# EAGLE board breakout (EAGLE 7.2.0)
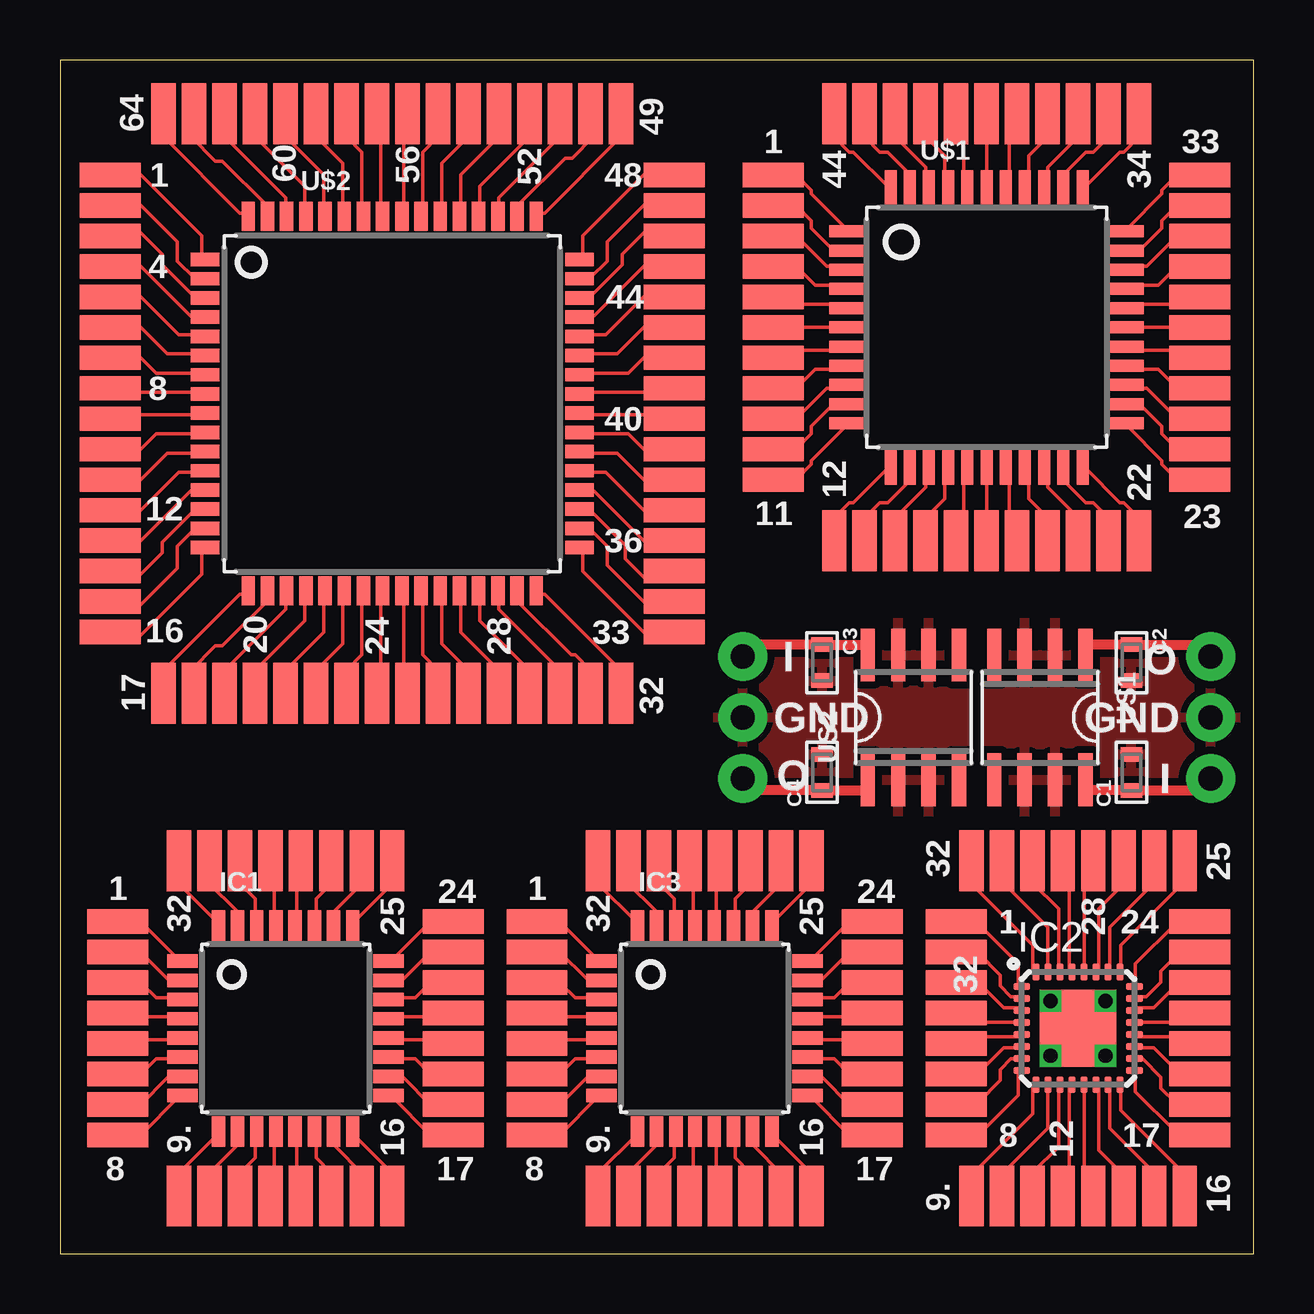
[diagram p0: board, top side]
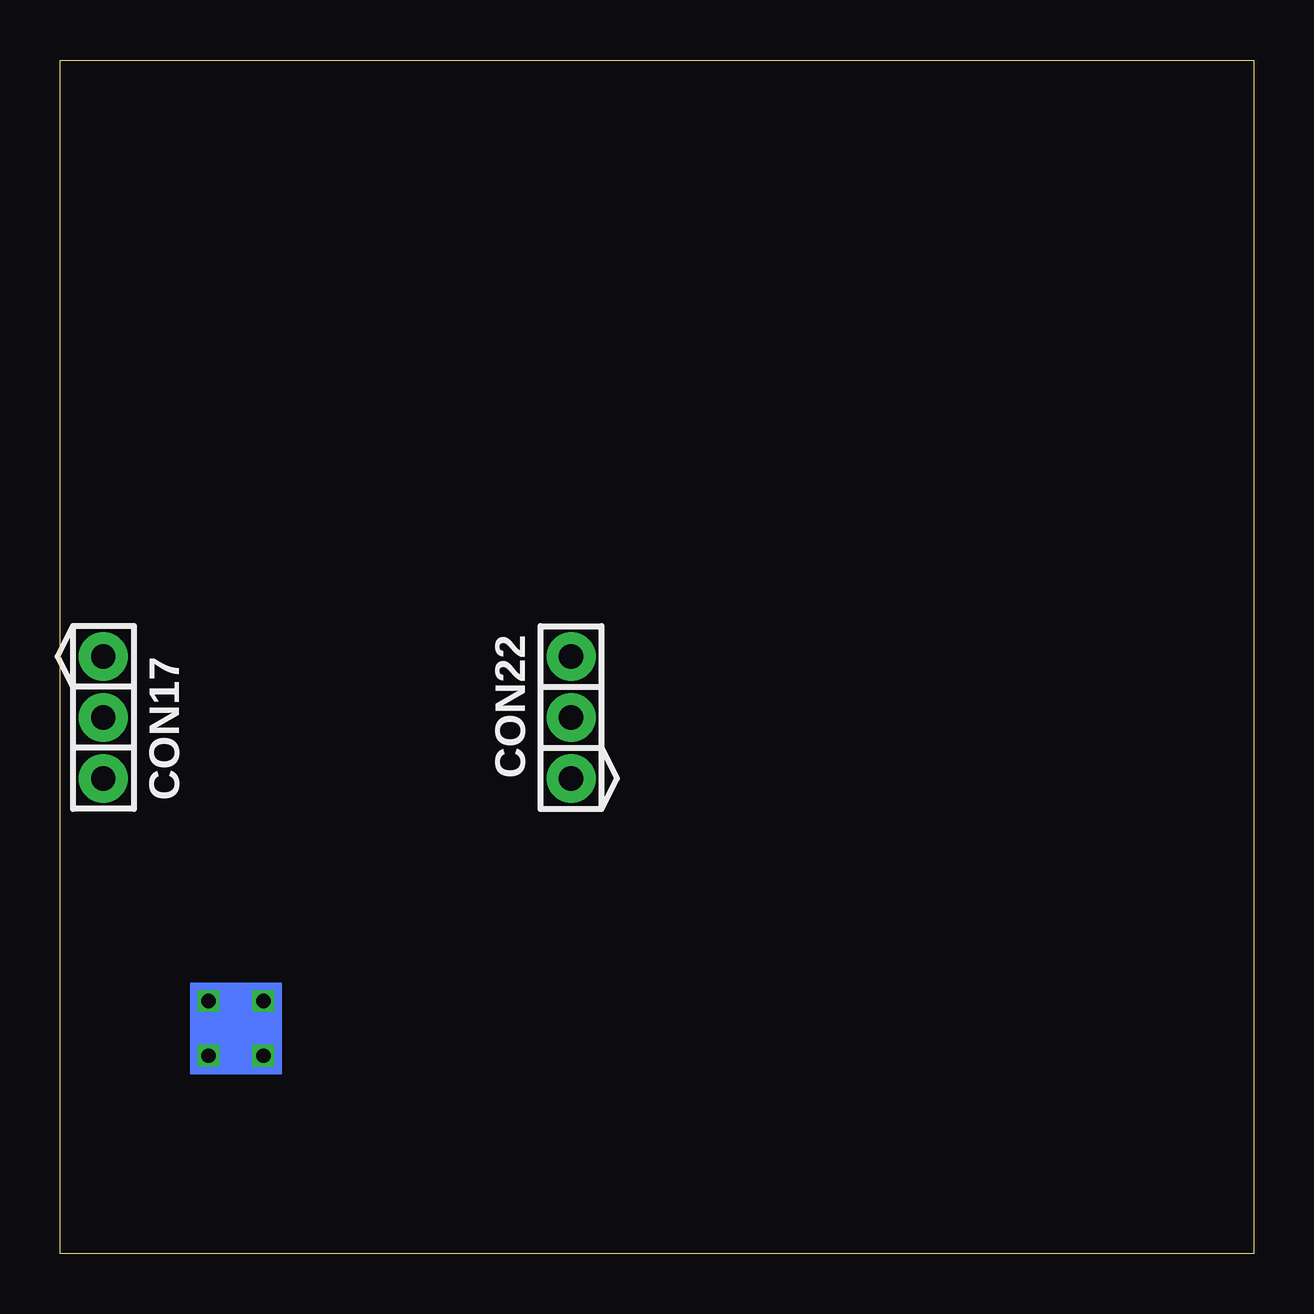
[diagram p1: board, bottom side, seen from below]

Size 49.75 x 49.75 mm. Coordinates in mm from the lower left corner, seen from the top.
Outline: 0,0 49.75,0 49.75,49.75 0,49.75 0,0
Copper layers (1*16): Top 0.035mm / dielectric 1.5mm / Bottom 0.035mm
Design rules "SeeedStudio_2layer_DRU_no_angle_20140221": minimum track width 6mil, minimum drill 12mil, track to track 6mil, track to pad 6mil, pad to pad 6mil, via to via 6mil, smd to smd 0mil, copper to edge 10mil, drill to drill 10mil, minimum pad ring 10mil, minimum via ring 6mil, stop-mask expansion 2mil, vias tented up to drill 100mil, thermal gap 10mil

## Footprints (pad centres in the part's own frame; a part is rotated, then mirrored left to right if it is on the bottom)
0603 = smd 0.6 x 0.9: 1 -0.75,0; 2 0.75,0
PIN8X1_SM50 = smd 1.016 x 2.54: P$1 -4.445,0; P$2 -3.175,0; P$3 -1.905,0; P$4 -0.635,0; P$5 0.635,0; P$6 1.905,0; P$7 3.175,0; P$8 4.445,0
PIN11X1_SM50 = smd 1.016 x 2.54: P$1 -6.35,0; P$2 -5.08,0; P$3 -3.81,0; P$4 -2.54,0; P$5 -1.27,0; P$6 0,0; P$7 1.27,0; P$8 2.54,0; P$9 3.81,0; P$10 5.08,0; P$11 6.35,0
PIN16X1_SM50 = smd 1.016 x 2.54: P$1 -9.525,0; P$2 -8.255,0; P$3 -6.985,0; P$4 -5.715,0; P$5 -4.445,0; P$6 -3.175,0; P$7 -1.905,0; P$8 -0.635,0; P$9 0.635,0; P$10 1.905,0; P$11 3.175,0; P$12 4.445,0; P$13 5.715,0; P$14 6.985,0; P$15 8.255,0; P$16 9.525,0
PIN3X1 = drill 1.016 pad 2.032: 1 -2.54,0; 2 0,0; 3 2.54,0
TQFP32 = smd 1.27 x 0.559: 1 -4.293,2.8; 2 -4.293,2; 3 -4.293,1.2; 4 -4.293,0.4; 5 -4.293,-0.4; 6 -4.293,-1.2; 7 -4.293,-2; 8 -4.293,-2.8; 17 4.293,-2.8; 18 4.293,-2; 19 4.293,-1.2; 20 4.293,-0.4; 21 4.293,0.4; 22 4.293,1.2; 23 4.293,2; 24 4.293,2.8 | smd 0.559 x 1.27: 9 -2.8,-4.293; 10 -2,-4.293; 11 -1.2,-4.293; 12 -0.4,-4.293; 13 0.4,-4.293; 14 1.2,-4.293; 15 2,-4.293; 16 2.8,-4.293; 25 2.8,4.293; 26 2,4.293; 27 1.2,4.293; 28 0.4,4.293; 29 -0.4,4.293; 30 -1.2,4.293; 31 -2,4.293; 32 -2.8,4.293
MLF32-TH = smd 0.7 x 0.3: 1 -2.35,1.75; 2 -2.35,1.25; 3 -2.35,0.75; 4 -2.35,0.25; 5 -2.35,-0.25; 6 -2.35,-0.75; 7 -2.35,-1.25; 8 -2.35,-1.75; 17 2.35,-1.75; 18 2.35,-1.25; 19 2.35,-0.75; 20 2.35,-0.25; 21 2.35,0.25; 22 2.35,0.75; 23 2.35,1.25; 24 2.35,1.75 | smd 0.3 x 0.7: 9 -1.75,-2.35; 10 -1.25,-2.35; 11 -0.75,-2.35; 12 -0.25,-2.35; 13 0.25,-2.35; 14 0.75,-2.35; 15 1.25,-2.35; 16 1.75,-2.35; 25 1.75,2.35; 26 1.25,2.35; 27 0.75,2.35; 28 0.25,2.35; 29 -0.25,2.35; 30 -0.75,2.35; 31 -1.25,2.35; 32 -1.75,2.35 | smd 3.2 x 3.2: TH 0,0
TQFP44 = smd 1.5 x 0.5: 1 -5.8,4; 2 -5.8,3.2; 3 -5.8,2.4; 4 -5.8,1.6; 5 -5.8,0.8; 6 -5.8,0; 7 -5.8,-0.8; 8 -5.8,-1.6; 9 -5.8,-2.4; 10 -5.8,-3.2; 11 -5.8,-4; 23 5.8,-4; 24 5.8,-3.2; 25 5.8,-2.4; 26 5.8,-1.6; 27 5.8,-0.8; 28 5.8,0; 29 5.8,0.8; 30 5.8,1.6; 31 5.8,2.4; 32 5.8,3.2; 33 5.8,4 | smd 0.5 x 1.5: 12 -4,-5.8; 13 -3.2,-5.8; 14 -2.4,-5.8; 15 -1.6,-5.8; 16 -0.8,-5.8; 17 0,-5.8; 18 0.8,-5.8; 19 1.6,-5.8; 20 2.4,-5.8; 21 3.2,-5.8; 22 4,-5.8; 34 4,5.8; 35 3.2,5.8; 36 2.4,5.8; 37 1.6,5.8; 38 0.8,5.8; 39 0,5.8; 40 -0.8,5.8; 41 -1.6,5.8; 42 -2.4,5.8; 43 -3.2,5.8; 44 -4,5.8
TQFP64 = smd 1.194 x 0.559: 1 -7.8,6; 2 -7.8,5.2; 3 -7.8,4.4; 4 -7.8,3.6; 5 -7.8,2.8; 6 -7.8,2; 7 -7.8,1.2; 8 -7.8,0.4; 9 -7.8,-0.4; 10 -7.8,-1.2; 11 -7.8,-2; 12 -7.8,-2.8; 13 -7.8,-3.6; 14 -7.8,-4.4; 15 -7.8,-5.2; 16 -7.8,-6; 33 7.8,-6; 34 7.8,-5.2; 35 7.8,-4.4; 36 7.8,-3.6; 37 7.8,-2.8; 38 7.8,-2; 39 7.8,-1.2; 40 7.8,-0.4; 41 7.8,0.4; 42 7.8,1.2; 43 7.8,2; 44 7.8,2.8; 45 7.8,3.6; 46 7.8,4.4; 47 7.8,5.2; 48 7.8,6 | smd 0.559 x 1.194: 17 -6,-7.8; 18 -5.2,-7.8; 19 -4.4,-7.8; 20 -3.6,-7.8; 21 -2.8,-7.8; 22 -2,-7.8; 23 -1.2,-7.8; 24 -0.4,-7.8; 25 0.4,-7.8; 26 1.2,-7.8; 27 2,-7.8; 28 2.8,-7.8; 29 3.6,-7.8; 30 4.4,-7.8; 31 5.2,-7.8; 32 6,-7.8; 49 6,7.8; 50 5.2,7.8; 51 4.4,7.8; 52 3.6,7.8; 53 2.8,7.8; 54 2,7.8; 55 1.2,7.8; 56 0.4,7.8; 57 -0.4,7.8; 58 -1.2,7.8; 59 -2,7.8; 60 -2.8,7.8; 61 -3.6,7.8; 62 -4.4,7.8; 63 -5.2,7.8; 64 -6,7.8
SO08 = smd 0.6 x 2.2: 1 -1.905,-2.6; 2 -0.635,-2.6; 3 0.635,-2.6; 4 1.905,-2.6; 5 1.905,2.6; 6 0.635,2.6; 7 -0.635,2.6; 8 -1.905,2.6

## Placement (x,y rotation side)
C1  [0603]  44.64,20.07 90 top
C2  [0603]  44.64,24.64 270 top
C3  [0603]  31.75,24.64 270 top
C4  [0603]  31.75,20.07 90 top
CON1  [PIN8X1_SM50]  2.41,9.4 270 top
CON2  [PIN8X1_SM50]  9.4,2.41 0 top
CON3  [PIN8X1_SM50]  16.38,9.4 90 top
CON4  [PIN8X1_SM50]  9.4,16.38 180 top
CON5  [PIN11X1_SM50]  29.72,38.61 270 top
CON6  [PIN11X1_SM50]  38.61,29.72 0 top
CON7  [PIN11X1_SM50]  47.5,38.61 90 top
CON8  [PIN11X1_SM50]  38.61,47.5 180 top
CON9  [PIN16X1_SM50]  2.1,35.43 270 top
CON10  [PIN16X1_SM50]  13.84,23.37 0 top
CON11  [PIN16X1_SM50]  25.59,35.43 90 top
CON12  [PIN16X1_SM50]  13.84,47.5 180 top
CON13  [PIN8X1_SM50]  37.34,9.4 270 top
CON14  [PIN8X1_SM50]  42.42,2.41 0 top
CON15  [PIN8X1_SM50]  47.5,9.4 90 top
CON16  [PIN8X1_SM50]  42.42,16.38 180 top
CON17  [PIN3X1]  47.94,22.35 270 bottom
CON18  [PIN8X1_SM50]  19.88,9.4 270 top
CON19  [PIN8X1_SM50]  26.86,2.41 0 top
CON20  [PIN8X1_SM50]  33.85,9.4 90 top
CON21  [PIN8X1_SM50]  26.86,16.38 180 top
CON22  [PIN3X1]  28.45,22.35 90 bottom
IC1  [TQFP32]  9.4,9.4 0 top
IC2  [MLF32-TH]  42.42,9.4 0 top
IC3  [TQFP32]  26.86,9.4 0 top
U$1  44TQFP  [TQFP44]  38.61,38.61 0 top
U$2  64TQFP  [TQFP64]  13.84,35.43 0 top
US1  [SO08]  40.83,22.35 180 top
US2  [SO08]  35.56,22.35 0 top

## Library data of the parts
C1-C4 = PN_default
CON1-CON16 CON18-CON21 IC1-IC3 U$1 U$2 = us_obudowy
CON17 CON22 = pins
US1 US2 = semiconductors

## Nets
N$1: CON1.P$1 IC1.1
N$2: CON1.P$2 IC1.2
N$3: CON1.P$3 IC1.3
N$4: CON1.P$4 IC1.4
N$5: CON1.P$5 IC1.5
N$6: CON1.P$6 IC1.6
N$7: CON1.P$7 IC1.7
N$8: CON1.P$8 IC1.8
N$9: CON2.P$1 IC1.9
N$10: CON2.P$2 IC1.10
N$11: CON2.P$3 IC1.11
N$12: CON2.P$4 IC1.12
N$13: CON2.P$5 IC1.13
N$14: CON2.P$6 IC1.14
N$15: CON2.P$7 IC1.15
N$16: CON2.P$8 IC1.16
N$17: CON3.P$1 IC1.17
N$18: CON3.P$2 IC1.18
N$19: CON3.P$3 IC1.19
N$20: CON3.P$4 IC1.20
N$21: CON3.P$5 IC1.21
N$22: CON3.P$6 IC1.22
N$23: CON3.P$7 IC1.23
N$24: CON3.P$8 IC1.24
N$25: CON4.P$1 IC1.25
N$26: CON4.P$2 IC1.26
N$27: CON4.P$3 IC1.27
N$28: CON4.P$4 IC1.28
N$29: CON4.P$5 IC1.29
N$30: CON4.P$6 IC1.30
N$31: CON4.P$7 IC1.31
N$32: CON4.P$8 IC1.32
N$33: CON5.P$1 U$1.1
N$34: CON5.P$2 U$1.2
N$35: CON5.P$3 U$1.3
N$36: CON5.P$4 U$1.4
N$37: CON5.P$5 U$1.5
N$38: CON5.P$6 U$1.6
N$39: CON5.P$7 U$1.7
N$40: CON5.P$8 U$1.8
N$41: CON5.P$9 U$1.9
N$42: CON5.P$10 U$1.10
N$43: CON5.P$11 U$1.11
N$44: CON6.P$1 U$1.12
N$45: CON6.P$2 U$1.13
N$46: CON6.P$3 U$1.14
N$47: CON6.P$4 U$1.15
N$48: CON6.P$5 U$1.16
N$49: CON6.P$6 U$1.17
N$50: CON6.P$7 U$1.18
N$51: CON6.P$8 U$1.19
N$52: CON6.P$9 U$1.20
N$53: CON6.P$10 U$1.21
N$54: CON6.P$11 U$1.22
N$55: CON7.P$1 U$1.23
N$56: CON7.P$2 U$1.24
N$57: CON7.P$3 U$1.25
N$58: CON7.P$4 U$1.26
N$59: CON7.P$5 U$1.27
N$60: CON7.P$6 U$1.28
N$61: CON7.P$7 U$1.29
N$62: CON7.P$8 U$1.30
N$63: CON7.P$9 U$1.31
N$64: CON7.P$10 U$1.32
N$65: CON7.P$11 U$1.33
N$66: CON8.P$1 U$1.34
N$67: CON8.P$2 U$1.35
N$68: CON8.P$3 U$1.36
N$69: CON8.P$4 U$1.37
N$70: CON8.P$5 U$1.38
N$71: CON8.P$6 U$1.39
N$72: CON8.P$7 U$1.40
N$73: CON8.P$8 U$1.41
N$74: CON8.P$9 U$1.42
N$75: CON8.P$10 U$1.43
N$76: CON8.P$11 U$1.44
N$77: CON9.P$1 U$2.1
N$78: CON9.P$2 U$2.2
N$79: CON9.P$3 U$2.3
N$80: CON9.P$4 U$2.4
N$81: CON9.P$5 U$2.5
N$82: CON9.P$6 U$2.6
N$83: CON9.P$7 U$2.7
N$84: CON9.P$8 U$2.8
N$85: CON9.P$9 U$2.9
N$86: CON9.P$10 U$2.10
N$87: CON9.P$11 U$2.11
N$88: CON9.P$12 U$2.12
N$89: CON9.P$13 U$2.13
N$90: CON9.P$14 U$2.14
N$91: CON9.P$15 U$2.15
N$92: CON9.P$16 U$2.16
N$93: CON10.P$1 U$2.17
N$94: CON10.P$2 U$2.18
N$95: CON10.P$3 U$2.19
N$96: CON10.P$4 U$2.20
N$97: CON10.P$5 U$2.21
N$98: CON10.P$6 U$2.22
N$99: CON10.P$7 U$2.23
N$100: CON10.P$8 U$2.24
N$101: CON10.P$9 U$2.25
N$102: CON10.P$10 U$2.26
N$103: CON10.P$11 U$2.27
N$104: CON10.P$12 U$2.28
N$105: CON10.P$13 U$2.29
N$106: CON10.P$14 U$2.30
N$107: CON10.P$15 U$2.31
N$108: CON10.P$16 U$2.32
N$109: CON11.P$1 U$2.33
N$110: CON11.P$2 U$2.34
N$111: CON11.P$3 U$2.35
N$112: CON11.P$4 U$2.36
N$113: CON11.P$5 U$2.37
N$114: CON11.P$6 U$2.38
N$115: CON11.P$7 U$2.39
N$116: CON11.P$8 U$2.40
N$117: CON11.P$9 U$2.41
N$118: CON11.P$10 U$2.42
N$119: CON11.P$11 U$2.43
N$120: CON11.P$12 U$2.44
N$121: CON11.P$13 U$2.45
N$122: CON11.P$14 U$2.46
N$123: CON11.P$15 U$2.47
N$124: CON11.P$16 U$2.48
N$125: CON12.P$1 U$2.49
N$126: CON12.P$2 U$2.50
N$127: CON12.P$3 U$2.51
N$128: CON12.P$4 U$2.52
N$129: CON12.P$5 U$2.53
N$130: CON12.P$6 U$2.54
N$131: CON12.P$7 U$2.55
N$132: CON12.P$8 U$2.56
N$133: CON12.P$9 U$2.57
N$134: CON12.P$10 U$2.58
N$135: CON12.P$11 U$2.59
N$136: CON12.P$12 U$2.60
N$137: CON12.P$13 U$2.61
N$138: CON12.P$14 U$2.62
N$139: CON12.P$15 U$2.63
N$140: CON12.P$16 U$2.64
N$141: CON13.P$1 IC2.1
N$142: CON13.P$2 IC2.2
N$143: CON13.P$3 IC2.3
N$144: CON13.P$4 IC2.4
N$145: CON13.P$5 IC2.5
N$146: CON13.P$6 IC2.6
N$147: CON13.P$7 IC2.7
N$148: CON13.P$8 IC2.8
N$149: CON14.P$1 IC2.9
N$150: CON14.P$2 IC2.10
N$151: CON14.P$3 IC2.11
N$152: CON14.P$4 IC2.12
N$153: CON14.P$5 IC2.13
N$154: CON14.P$6 IC2.14
N$155: CON14.P$7 IC2.15
N$156: CON14.P$8 IC2.16
N$157: CON15.P$1 IC2.17
N$158: CON15.P$2 IC2.18
N$159: CON15.P$3 IC2.19
N$160: CON15.P$4 IC2.20
N$161: CON15.P$5 IC2.21
N$162: CON15.P$6 IC2.22
N$163: CON15.P$7 IC2.23
N$164: CON15.P$8 IC2.24
N$165: CON16.P$1 IC2.25
N$166: CON16.P$2 IC2.26
N$167: CON16.P$3 IC2.27
N$168: CON16.P$4 IC2.28
N$169: CON16.P$5 IC2.29
N$170: CON16.P$6 IC2.30
N$171: CON16.P$7 IC2.31
N$172: CON16.P$8 IC2.32
N$177: C2.1 CON17.1 US1.1
N$178: C1.1 CON17.3 US1.8
N$179: C1.2 C2.2 CON17.2 US1.2 US1.3 US1.6 US1.7
N$180: CON18.P$1 IC3.1
N$181: CON18.P$2 IC3.2
N$182: CON18.P$3 IC3.3
N$183: CON18.P$4 IC3.4
N$184: CON18.P$5 IC3.5
N$185: CON18.P$6 IC3.6
N$186: CON18.P$7 IC3.7
N$187: CON18.P$8 IC3.8
N$188: CON19.P$1 IC3.9
N$189: CON19.P$2 IC3.10
N$190: CON19.P$3 IC3.11
N$191: CON19.P$4 IC3.12
N$192: CON19.P$5 IC3.13
N$193: CON19.P$6 IC3.14
N$194: CON19.P$7 IC3.15
N$195: CON19.P$8 IC3.16
N$196: CON20.P$1 IC3.17
N$197: CON20.P$2 IC3.18
N$198: CON20.P$3 IC3.19
N$199: CON20.P$4 IC3.20
N$200: CON20.P$5 IC3.21
N$201: CON20.P$6 IC3.22
N$202: CON20.P$7 IC3.23
N$203: CON20.P$8 IC3.24
N$204: CON21.P$1 IC3.25
N$205: CON21.P$2 IC3.26
N$206: CON21.P$3 IC3.27
N$207: CON21.P$4 IC3.28
N$208: CON21.P$5 IC3.29
N$209: CON21.P$6 IC3.30
N$210: CON21.P$7 IC3.31
N$211: CON21.P$8 IC3.32
N$212: C4.1 CON22.1 US2.1
N$213: C3.1 CON22.3 US2.8
N$214: C3.2 C4.2 CON22.2 US2.2 US2.3 US2.6 US2.7

## Tracks (layer width: path | path; a pad name or v marks a point on that pad's centre or on a via)
N$1
  Top 0.152: CON1.P$1 3.37,13.84 4.95,12.26 IC1.1
N$2
  Top 0.152: CON1.P$2 3.37,12.57 4.48,11.46 4.95,11.46 IC1.2
N$3
  Top 0.152: CON1.P$3 3.37,11.3 4,10.67 4.95,10.67 IC1.3
N$4
  Top 0.152: CON1.P$4 2.57,9.87 4.95,9.87 IC1.4
N$5
  Top 0.152: CON1.P$5 2.57,8.92 4.95,8.92 IC1.5
N$6
  Top 0.152: CON1.P$6 3.37,7.49 4,8.13 4.95,8.13 IC1.6
N$7
  Top 0.152: CON1.P$7 3.37,6.22 4.48,7.33 4.95,7.33 IC1.7
N$8
  Top 0.152: CON1.P$8 3.37,4.95 4.95,6.54 IC1.8
N$9
  Top 0.152: CON2.P$1 4.95,3.37 6.54,4.95 IC1.9
N$10
  Top 0.152: CON2.P$2 6.22,3.37 7.33,4.48 7.33,4.95 IC1.10
N$11
  Top 0.152: CON2.P$3 7.49,3.37 8.13,4 8.13,4.95 IC1.11
N$12
  Top 0.152: CON2.P$4 8.92,2.57 8.92,4.95 IC1.12
N$13
  Top 0.152: CON2.P$5 9.87,2.57 9.87,4.95 IC1.13
N$14
  Top 0.152: CON2.P$6 11.3,3.37 10.67,4 10.67,4.95 IC1.14
N$15
  Top 0.152: CON2.P$7 12.57,3.37 11.46,4.48 11.46,4.95 IC1.15
N$16
  Top 0.152: CON2.P$8 13.84,3.37 12.26,4.95 IC1.16
N$17
  Top 0.152: CON3.P$1 15.43,4.95 13.84,6.54 IC1.17
N$18
  Top 0.152: CON3.P$2 15.43,6.22 14.32,7.33 13.84,7.33 IC1.18
N$19
  Top 0.152: CON3.P$3 15.43,7.49 14.8,8.13 13.84,8.13 IC1.19
N$20
  Top 0.152: CON3.P$4 16.22,8.92 13.84,8.92 IC1.20
N$21
  Top 0.152: CON3.P$5 16.22,9.87 13.84,9.87 IC1.21
N$22
  Top 0.152: CON3.P$6 15.43,11.3 14.8,10.67 13.84,10.67 IC1.22
N$23
  Top 0.152: CON3.P$7 15.43,12.57 14.32,11.46 13.84,11.46 IC1.23
N$24
  Top 0.152: CON3.P$8 15.43,13.84 13.84,12.26 IC1.24
N$25
  Top 0.152: CON4.P$1 13.84,15.43 12.26,13.84 IC1.25
N$26
  Top 0.152: CON4.P$2 12.57,15.43 11.46,14.32 11.46,13.84 IC1.26
N$27
  Top 0.152: CON4.P$3 11.3,15.43 10.67,14.8 10.67,13.84 IC1.27
N$28
  Top 0.152: CON4.P$4 9.87,16.22 9.87,13.84 IC1.28
N$29
  Top 0.152: CON4.P$5 8.92,16.22 8.92,13.84 IC1.29
N$30
  Top 0.152: CON4.P$6 7.49,15.43 8.13,14.8 8.13,13.84 IC1.30
N$31
  Top 0.152: CON4.P$7 6.22,15.43 7.33,14.32 7.33,13.84 IC1.31
N$32
  Top 0.152: CON4.P$8 4.95,15.43 6.54,13.84 IC1.32
N$33
  Top 0.152: CON5.P$1 30.67,44.96 31.3,44.32 31.3,44.16 32.73,42.74 U$1.1
N$34
  Top 0.152: CON5.P$2 30.67,43.69 31.3,43.05 31.3,42.74 32.1,41.94 32.73,41.94 U$1.2
N$35
  Top 0.152: CON5.P$3 30.67,42.42 31.94,41.15 32.73,41.15 U$1.3
N$36
  Top 0.152: CON5.P$4 30.67,41.15 31.46,40.35 32.73,40.35 U$1.4
N$37
  Top 0.152: CON5.P$5 30.04,39.56 32.73,39.56 U$1.5
N$38
  Top 0.152: CON5.P$6 U$1.6
N$39
  Top 0.152: CON5.P$7 30.04,37.66 32.73,37.66 U$1.7
N$40
  Top 0.152: CON5.P$8 30.67,36.07 31.46,36.86 32.73,36.86 U$1.8
N$41
  Top 0.152: CON5.P$9 30.67,34.8 31.94,36.07 32.73,36.07 U$1.9
N$42
  Top 0.152: CON5.P$10 30.67,33.53 31.3,34.16 31.3,34.48 32.1,35.27 32.73,35.27 U$1.10
N$43
  Top 0.152: CON5.P$11 30.67,32.26 31.3,32.89 31.3,33.05 32.73,34.48 U$1.11
N$44
  Top 0.152: CON6.P$1 32.26,30.67 32.89,31.3 33.05,31.3 34.48,32.73 U$1.12
N$45
  Top 0.152: CON6.P$2 33.53,30.67 34.16,31.3 34.48,31.3 35.27,32.1 35.27,32.73 U$1.13
N$46
  Top 0.152: CON6.P$3 34.8,30.67 36.07,31.94 36.07,32.73 U$1.14
N$47
  Top 0.152: CON6.P$4 36.07,30.67 36.86,31.46 36.86,32.73 U$1.15
N$48
  Top 0.152: CON6.P$5 37.66,30.04 37.66,32.73 U$1.16
N$49
  Top 0.152: CON6.P$6 U$1.17
N$50
  Top 0.152: CON6.P$7 39.56,30.04 39.56,32.73 U$1.18
N$51
  Top 0.152: CON6.P$8 41.15,30.67 40.35,31.46 40.35,32.73 U$1.19
N$52
  Top 0.152: CON6.P$9 42.42,30.67 41.15,31.94 41.15,32.73 U$1.20
N$53
  Top 0.152: CON6.P$10 43.69,30.67 43.05,31.3 42.74,31.3 41.94,32.1 41.94,32.73 U$1.21
N$54
  Top 0.152: CON6.P$11 44.96,30.67 44.32,31.3 44.16,31.3 42.74,32.73 U$1.22
N$55
  Top 0.152: CON7.P$1 46.55,32.26 45.91,32.89 45.91,33.05 44.48,34.48 U$1.23
N$56
  Top 0.152: CON7.P$2 46.55,33.53 45.91,34.16 45.91,34.48 45.12,35.27 44.48,35.27 U$1.24
N$57
  Top 0.152: CON7.P$3 46.55,34.8 45.28,36.07 44.48,36.07 U$1.25
N$58
  Top 0.152: CON7.P$4 46.55,36.07 45.75,36.86 44.48,36.86 U$1.26
N$59
  Top 0.152: CON7.P$5 47.18,37.66 44.48,37.66 U$1.27
N$60
  Top 0.152: CON7.P$6 U$1.28
N$61
  Top 0.152: CON7.P$7 47.18,39.56 44.48,39.56 U$1.29
N$62
  Top 0.152: CON7.P$8 46.55,41.15 45.75,40.35 44.48,40.35 U$1.30
N$63
  Top 0.152: CON7.P$9 46.55,42.42 45.28,41.15 44.48,41.15 U$1.31
N$64
  Top 0.152: CON7.P$10 46.55,43.69 45.91,43.05 45.91,42.74 45.12,41.94 44.48,41.94 U$1.32
N$65
  Top 0.152: CON7.P$11 46.55,44.96 45.91,44.32 45.91,44.16 44.48,42.74 U$1.33
N$66
  Top 0.152: CON8.P$1 44.96,46.55 44.32,45.91 44.16,45.91 42.74,44.48 U$1.34
N$67
  Top 0.152: CON8.P$2 43.69,46.55 43.05,45.91 42.74,45.91 41.94,45.12 41.94,44.48 U$1.35
N$68
  Top 0.152: CON8.P$3 42.42,46.55 41.15,45.28 41.15,44.48 U$1.36
N$69
  Top 0.152: CON8.P$4 41.15,46.55 40.35,45.75 40.35,44.48 U$1.37
N$70
  Top 0.152: CON8.P$5 39.56,47.18 39.56,44.48 U$1.38
N$71
  Top 0.152: CON8.P$6 U$1.39
N$72
  Top 0.152: CON8.P$7 37.66,47.18 37.66,44.48 U$1.40
N$73
  Top 0.152: CON8.P$8 36.07,46.55 36.86,45.75 36.86,44.48 U$1.41
N$74
  Top 0.152: CON8.P$9 34.8,46.55 36.07,45.28 36.07,44.48 U$1.42
N$75
  Top 0.152: CON8.P$10 33.53,46.55 34.16,45.91 34.48,45.91 35.27,45.12 35.27,44.48 U$1.43
N$76
  Top 0.152: CON8.P$11 32.26,46.55 32.89,45.91 33.05,45.91 34.48,44.48 U$1.44
N$77
  Top 0.152: CON9.P$1 3.37,44.96 5.91,42.42 5.91,41.47 U$2.1
N$78
  Top 0.152: CON9.P$2 3.37,43.69 4.89,42.16 4.89,41.37 5.59,40.67 5.91,40.67 U$2.2
N$79
  Top 0.152: CON9.P$3 3.37,42.55 4.25,41.66 4.25,41.21 5.59,39.88 5.91,39.88 U$2.3
N$80
  Top 0.152: CON9.P$4 3.37,41.15 5.43,39.08 5.91,39.08 U$2.4
N$81
  Top 0.152: CON9.P$5 3.37,39.88 4.95,38.29 5.91,38.29 U$2.5
N$82
  Top 0.152: CON9.P$6 3.37,38.61 4.48,37.5 5.91,37.5 U$2.6
N$83
  Top 0.152: CON9.P$7 3.37,37.34 4,36.7 5.91,36.7 U$2.7
N$84
  Top 0.152: CON9.P$8 2.57,35.91 5.91,35.91 U$2.8
N$85
  Top 0.152: CON9.P$9 2.57,34.96 5.91,34.96 U$2.9
N$86
  Top 0.152: CON9.P$10 3.37,33.53 4,34.16 5.91,34.16 U$2.10
N$87
  Top 0.152: CON9.P$11 3.37,32.26 4.48,33.37 5.91,33.37 U$2.11
N$88
  Top 0.152: CON9.P$12 3.37,30.99 4.95,32.58 5.91,32.58 U$2.12
N$89
  Top 0.152: CON9.P$13 3.37,29.72 5.43,31.78 5.91,31.78 U$2.13
N$90
  Top 0.152: CON9.P$14 3.37,28.32 4.25,29.21 4.25,29.65 5.59,30.99 5.91,30.99 U$2.14
N$91
  Top 0.152: CON9.P$15 3.37,27.05 4.89,28.57 4.89,29.5 5.59,30.19 5.91,30.19 U$2.15
N$92
  Top 0.152: CON9.P$16 3.37,25.78 5.91,28.32 5.91,29.4 U$2.16
N$93
  Top 0.152: CON10.P$1 4.32,24.32 7.49,27.5 7.81,27.5 U$2.17
N$94
  Top 0.152: CON10.P$2 5.46,24.32 6.48,25.34 6.76,25.34 8.6,27.18 8.6,27.5 U$2.18
N$95
  Top 0.152: CON10.P$3 6.86,24.32 9.4,26.86 9.4,27.5 U$2.19
N$96
  Top 0.152: CON10.P$4 8.13,24.32 10.19,26.38 10.19,27.5 U$2.20
N$97
  Top 0.152: CON10.P$5 9.4,24.32 10.99,25.91 10.99,27.5 U$2.21
N$98
  Top 0.152: CON10.P$6 10.67,24.32 11.78,25.43 11.78,27.5 U$2.22
N$99
  Top 0.152: CON10.P$7 11.94,24.32 12.57,24.96 12.57,27.5 U$2.23
N$100
  Top 0.152: CON10.P$8 13.37,23.53 13.37,27.5 U$2.24
N$101
  Top 0.152: CON10.P$9 14.32,23.53 14.32,27.5 U$2.25
N$102
  Top 0.152: CON10.P$10 15.75,24.32 15.11,24.96 15.11,27.5 U$2.26
N$103
  Top 0.152: CON10.P$11 17.02,24.32 15.91,25.43 15.91,27.5 U$2.27
N$104
  Top 0.152: CON10.P$12 18.29,24.32 16.7,25.91 16.7,27.5 U$2.28
N$105
  Top 0.152: CON10.P$13 19.56,24.32 17.49,26.38 17.49,27.5 U$2.29
N$106
  Top 0.152: CON10.P$14 20.83,24.32 18.29,26.86 18.29,27.5 U$2.30
N$107
  Top 0.152: CON10.P$15 22.1,24.32 21.46,24.96 21.3,24.96 19.08,27.18 19.08,27.5 U$2.31
N$108
  Top 0.152: CON10.P$16 23.37,24.32 20.19,27.5 19.88,27.5 U$2.32
N$109
  Top 0.152: CON11.P$1 24.32,25.91 21.78,28.45 21.78,29.4 U$2.33
N$110
  Top 0.152: CON11.P$2 24.32,27.18 22.8,28.7 22.8,29.5 22.1,30.19 21.78,30.19 U$2.34
N$111
  Top 0.152: CON11.P$3 24.32,28.19 23.56,28.96 23.56,29.53 22.1,30.99 21.78,30.99 U$2.35
N$112
  Top 0.152: CON11.P$4 24.32,29.72 22.26,31.78 21.78,31.78 U$2.36
N$113
  Top 0.152: CON11.P$5 24.32,30.99 22.73,32.58 21.78,32.58 U$2.37
N$114
  Top 0.152: CON11.P$6 24.32,32.26 23.21,33.37 21.78,33.37 U$2.38
N$115
  Top 0.152: CON11.P$7 24.32,33.53 23.69,34.16 21.78,34.16 U$2.39
N$116
  Top 0.152: CON11.P$8 25.11,34.96 21.78,34.96 U$2.40
N$117
  Top 0.152: CON11.P$9 25.11,35.91 21.78,35.91 U$2.41
N$118
  Top 0.152: CON11.P$10 24.32,37.34 23.69,36.7 21.78,36.7 U$2.42
N$119
  Top 0.152: CON11.P$11 24.32,38.61 23.21,37.5 21.78,37.5 U$2.43
N$120
  Top 0.152: CON11.P$12 24.32,39.88 22.73,38.29 21.78,38.29 U$2.44
N$121
  Top 0.152: CON11.P$13 24.32,41.15 22.26,39.08 21.78,39.08 U$2.45
N$122
  Top 0.152: CON11.P$14 24.32,42.55 23.43,41.66 23.43,41.21 22.1,39.88 21.78,39.88 U$2.46
N$123
  Top 0.152: CON11.P$15 24.32,43.69 22.8,42.16 22.8,41.37 22.1,40.67 21.78,40.67 U$2.47
N$124
  Top 0.152: CON11.P$16 24.32,44.96 21.78,42.42 21.78,41.47 U$2.48
N$125
  Top 0.152: CON12.P$1 23.37,46.55 20.19,43.37 19.88,43.37 U$2.49
N$126
  Top 0.152: CON12.P$2 22.23,46.55 21.34,45.66 21.05,45.66 19.08,43.69 19.08,43.37 U$2.50
N$127
  Top 0.152: CON12.P$3 20.83,46.55 18.29,44.01 18.29,43.37 U$2.51
N$128
  Top 0.152: CON12.P$4 19.56,46.55 17.49,44.48 17.49,43.37 U$2.52
N$129
  Top 0.152: CON12.P$5 18.29,46.55 16.7,44.96 16.7,43.37 U$2.53
N$130
  Top 0.152: CON12.P$6 17.02,46.55 15.91,45.43 15.91,43.37 U$2.54
N$131
  Top 0.152: CON12.P$7 15.75,46.55 15.11,45.91 15.11,43.37 U$2.55
N$132
  Top 0.152: CON12.P$8 14.32,47.34 14.32,43.37 U$2.56
N$133
  Top 0.152: CON12.P$9 13.37,47.34 13.37,43.37 U$2.57
N$134
  Top 0.152: CON12.P$10 11.94,46.55 12.57,45.91 12.57,43.37 U$2.58
N$135
  Top 0.152: CON12.P$11 10.67,46.55 11.78,45.43 11.78,43.37 U$2.59
N$136
  Top 0.152: CON12.P$12 9.4,46.55 10.99,44.96 10.99,43.37 U$2.60
N$137
  Top 0.152: CON12.P$13 8.13,46.55 10.19,44.48 10.19,43.37 U$2.61
N$138
  Top 0.152: CON12.P$14 6.86,46.55 9.4,44.01 9.4,43.37 U$2.62
N$139
  Top 0.152: CON12.P$15 5.46,46.55 6.48,45.53 6.76,45.53 8.6,43.69 8.6,43.37 U$2.63
N$140
  Top 0.152: CON12.P$16 4.32,46.55 7.49,43.37 7.81,43.37 U$2.64
N$141
  Top 0.152: IC2.1 39.93,11.18 39.93,12.09 38.25,13.77 37.34,13.77 CON13.P$1
N$142
  Top 0.152: IC2.2 39.93,10.72 39.62,10.72 39.18,11.16 39.18,11.62 38.25,12.55 37.34,12.55 CON13.P$2
N$143
  Top 0.152: IC2.3 39.93,10.26 39.32,10.26 38.41,11.18 37.34,11.18 CON13.P$3
N$144
  Top 0.152: IC2.4 39.93,9.65 37.64,9.65 37.34,9.96 CON13.P$4
N$145
  Top 0.152: IC2.5 39.93,9.04 37.49,9.04 37.34,8.89 CON13.P$5
N$146
  Top 0.152: IC2.6 39.93,8.59 39.32,8.59 38.25,7.52 37.34,7.52 CON13.P$6
N$147
  Top 0.152: IC2.7 39.93,8.13 39.62,8.13 39.18,7.68 39.18,7.23 38.25,6.3 37.34,6.3 CON13.P$7
N$148
  Top 0.152: IC2.8 39.93,7.52 39.93,6.6 38.41,5.08 37.34,5.08 CON13.P$8
N$149
  Top 0.152: IC2.9 40.54,6.91 40.54,5.84 38.1,3.4 38.1,2.49 CON14.P$1
N$150
  Top 0.152: IC2.10 41.15,6.91 41.15,5.23 39.32,3.4 39.32,2.49 CON14.P$2
N$151
  Top 0.152: IC2.11 41.6,6.91 41.6,4.47 40.54,3.4 40.54,2.49 CON14.P$3
N$152
  Top 0.152: IC2.12 42.06,6.91 42.06,2.64 41.91,2.49 CON14.P$4
N$153
  Top 0.152: CON14.P$5 42.67,2.79 42.67,6.91 IC2.13
N$154
  Top 0.152: IC2.14 43.28,6.91 43.28,4.32 44.2,3.4 44.2,2.49 CON14.P$6
N$155
  Top 0.152: IC2.15 43.74,6.91 43.74,5.23 45.57,3.4 45.57,2.49 CON14.P$7
N$156
  Top 0.152: IC2.16 44.2,6.91 44.2,5.99 46.79,3.4 46.79,2.49 CON14.P$8
N$157
  Top 0.152: IC2.17 44.81,7.52 44.81,6.76 46.48,5.08 47.4,5.08 CON15.P$1
N$158
  Top 0.152: IC2.18 44.81,8.13 45.11,8.13 45.87,7.37 45.87,6.91 46.48,6.3 47.4,6.3 CON15.P$2
N$159
  Top 0.152: IC2.19 44.81,8.59 45.57,8.59 46.63,7.52 47.4,7.52 CON15.P$3
N$160
  Top 0.152: IC2.20 44.81,9.04 47.24,9.04 47.4,8.89 CON15.P$4
N$161
  Top 0.152: IC2.21 44.81,9.65 47.09,9.65 47.4,9.96 CON15.P$5
N$162
  Top 0.152: IC2.22 44.81,10.26 45.57,10.26 46.48,11.18 47.4,11.18 CON15.P$6
N$163
  Top 0.152: IC2.23 44.81,10.72 45.26,10.72 45.87,11.33 45.87,11.79 46.63,12.55 47.4,12.55 CON15.P$7
N$164
  Top 0.152: IC2.24 44.81,11.18 44.81,12.09 46.48,13.77 47.4,13.77 CON15.P$8
N$165
  Top 0.152: IC2.25 44.2,11.79 44.2,12.85 46.79,15.44 46.79,16.36 CON16.P$1
N$166
  Top 0.152: IC2.26 43.74,11.79 43.74,13.61 45.57,15.44 45.57,16.36 CON16.P$2
N$167
  Top 0.152: IC2.27 43.28,11.79 43.28,14.38 44.2,15.29 44.2,16.36 CON16.P$3
N$168
  Top 0.152: IC2.28 42.67,11.79 42.67,16.05 42.98,16.36 CON16.P$4
N$169
  Top 0.152: IC2.29 42.06,11.79 42.06,16.2 41.91,16.36 CON16.P$5
N$170
  Top 0.152: IC2.30 41.6,11.79 41.6,14.38 40.54,15.44 40.54,16.36 CON16.P$6
N$171
  Top 0.152: IC2.31 41.15,11.79 41.15,13.61 39.32,15.44 39.32,16.36 CON16.P$7
N$172
  Top 0.152: IC2.32 40.54,11.79 40.54,12.85 38.1,15.29 38.1,16.36 CON16.P$8
N$173  (via drill 0.6)
  other vias: 41.27,10.54
N$174  (via drill 0.6)
  other vias: 43.56,10.54
N$175  (via drill 0.6)
  other vias: 43.56,8.26
N$176  (via drill 0.6)
  other vias: 41.27,8.26
N$177
  Top 0.406: 42.79,25.01 US1.1 42.74,25.39 C2.1 47.94,25.39 CON17.1
N$178
  Top 0.406: 42.79,19.7 US1.8 42.74,19.32 C1.1 47.94,19.32 CON17.3
N$179
  pour Top (isolate 0.305): 48.96,18.41 38.67,18.41 38.67,26.29 48.96,26.29
N$180
  Top 0.152: CON18.P$1 20.83,13.84 22.42,12.26 IC3.1
N$181
  Top 0.152: CON18.P$2 20.83,12.57 21.94,11.46 22.42,11.46 IC3.2
N$182
  Top 0.152: CON18.P$3 20.83,11.3 21.46,10.67 22.42,10.67 IC3.3
N$183
  Top 0.152: CON18.P$4 20.03,9.87 22.42,9.87 IC3.4
N$184
  Top 0.152: CON18.P$5 20.03,8.92 22.42,8.92 IC3.5
N$185
  Top 0.152: CON18.P$6 20.83,7.49 21.46,8.13 22.42,8.13 IC3.6
N$186
  Top 0.152: CON18.P$7 20.83,6.22 21.94,7.33 22.42,7.33 IC3.7
N$187
  Top 0.152: CON18.P$8 20.83,4.95 22.42,6.54 IC3.8
N$188
  Top 0.152: CON19.P$1 22.42,3.37 24,4.95 IC3.9
N$189
  Top 0.152: CON19.P$2 23.69,3.37 24.8,4.48 24.8,4.95 IC3.10
N$190
  Top 0.152: CON19.P$3 24.96,3.37 25.59,4 25.59,4.95 IC3.11
N$191
  Top 0.152: CON19.P$4 26.38,2.57 26.38,4.95 IC3.12
N$192
  Top 0.152: CON19.P$5 27.34,2.57 27.34,4.95 IC3.13
N$193
  Top 0.152: CON19.P$6 28.77,3.37 28.13,4 28.13,4.95 IC3.14
N$194
  Top 0.152: CON19.P$7 30.04,3.37 28.92,4.48 28.92,4.95 IC3.15
N$195
  Top 0.152: CON19.P$8 31.3,3.37 29.72,4.95 IC3.16
N$196
  Top 0.152: CON20.P$1 32.89,4.95 31.3,6.54 IC3.17
N$197
  Top 0.152: CON20.P$2 32.89,6.22 31.78,7.33 31.3,7.33 IC3.18
N$198
  Top 0.152: CON20.P$3 32.89,7.49 32.26,8.13 31.3,8.13 IC3.19
N$199
  Top 0.152: CON20.P$4 33.69,8.92 31.3,8.92 IC3.20
N$200
  Top 0.152: CON20.P$5 33.69,9.87 31.3,9.87 IC3.21
N$201
  Top 0.152: CON20.P$6 32.89,11.3 32.26,10.67 31.3,10.67 IC3.22
N$202
  Top 0.152: CON20.P$7 32.89,12.57 31.78,11.46 31.3,11.46 IC3.23
N$203
  Top 0.152: CON20.P$8 32.89,13.84 31.3,12.26 IC3.24
N$204
  Top 0.152: CON21.P$1 31.3,15.43 29.72,13.84 IC3.25
N$205
  Top 0.152: CON21.P$2 30.04,15.43 28.92,14.32 28.92,13.84 IC3.26
N$206
  Top 0.152: CON21.P$3 28.77,15.43 28.13,14.8 28.13,13.84 IC3.27
N$207
  Top 0.152: CON21.P$4 27.34,16.22 27.34,13.84 IC3.28
N$208
  Top 0.152: CON21.P$5 26.38,16.22 26.38,13.84 IC3.29
N$209
  Top 0.152: CON21.P$6 24.96,15.43 25.59,14.8 25.59,13.84 IC3.30
N$210
  Top 0.152: CON21.P$7 23.69,15.43 24.8,14.32 24.8,13.84 IC3.31
N$211
  Top 0.152: CON21.P$8 22.42,15.43 24,13.84 IC3.32
N$212
  Top 0.406: 33.6,19.7 US2.1 33.66,19.32 C4.1 28.45,19.32 CON22.1
N$213
  Top 0.406: 33.6,25.01 US2.8 33.66,25.39 C3.1 28.45,25.39 CON22.3
N$214
  pour Top (isolate 0.305): 27.43,26.29 37.72,26.29 37.72,18.41 27.43,18.41
(copper drawn outside any net)
  shapes: Bottom area x1

## Text on the board
tPlace: 64 | 49 | 60 | 56 | 52 | 1 | 44 | 34 | 33 | 48 | 1 | 4 | 44 | 8 | 40 | 12 | 12 | 22 | 23 | 36 | 11 | 33 | 16 | 20 | 24 | 28 | O | I | 17 | GND | 32 | GND | I | O | 32 | 25 | 1 | 32 | 25 | 24 | 1 | 32 | 25 | 24 | 28 | 1 | 24 | 32 | 12 | 17 | 9. | 16 | 17 | 9. | 16 | 17 | 8 | 8 | 8 | 16 | 9.